# Altium PCB SENSEI_Base-Board_Clean.PcbDoc (part 4 of 7)
Units mm, origin at the board's own origin, x right, y up, seen from the top; angles counter-clockwise.
Board outline 25.2 x 15.15 mm, 8 copper layers (Top Sig/Pwr, GND1, Sig1, GND2, Sig2, Pwr, GND3, Bot Sig/Pwr), stack 1.53 mm thick; 187 components, 192 nets, 951 pads, 1831 vias.
Unrouted connection lines stored in the file: 214.
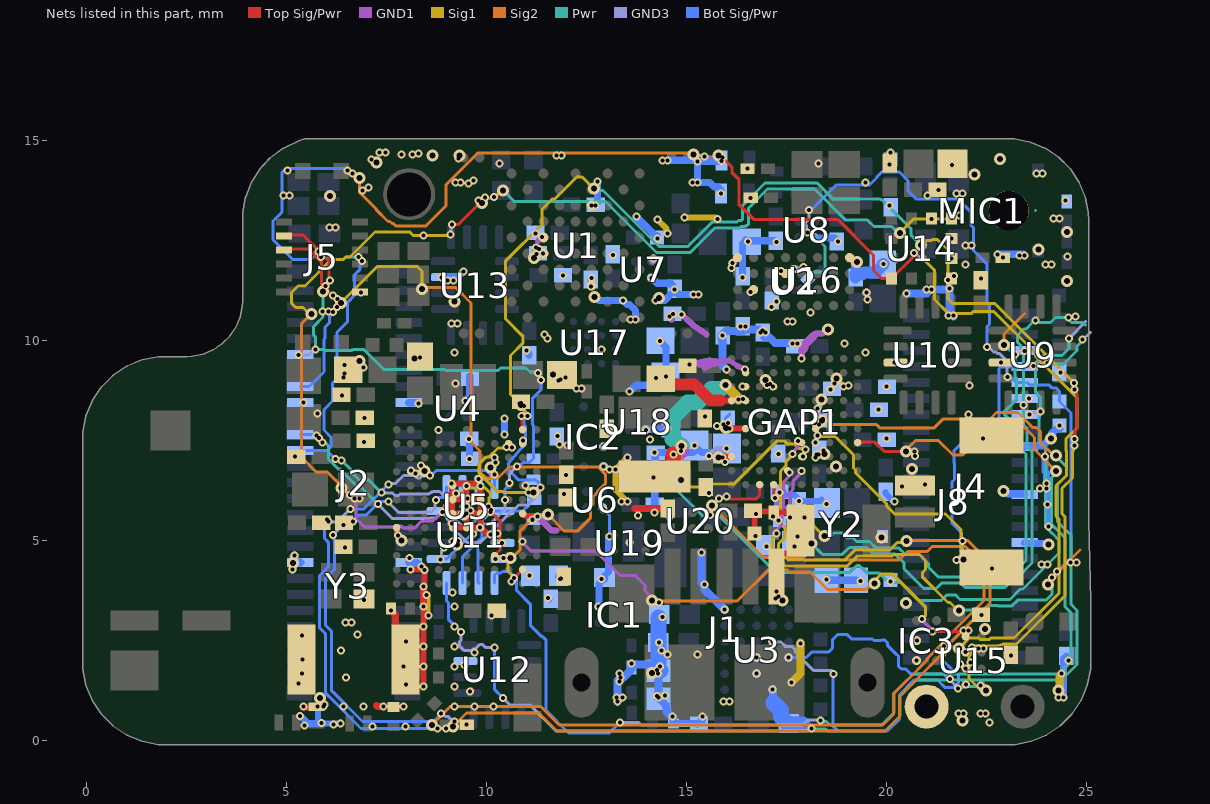
[diagram p9: the nets of this part, all layers, seen from the top]

## Via types
v1: diameter 0.2, hole 0.1, Top Sig/Pwr to GND1, 467 vias
v2: diameter 0.2, hole 0.1, GND3 to Bot Sig/Pwr, 431 vias
v3: diameter 0.2, hole 0.1, GND1 to Sig1, 369 vias
v4: diameter 0.3, hole 0.15, Sig1 to Pwr, 279 vias
v5: diameter 0.2, hole 0.1, Pwr to GND3, 270 vias
v6: diameter 0.3, hole 0.15, Top Sig/Pwr to Bot Sig/Pwr, tented both sides, 15 vias

## Nets (pads, with @x,y where several pads share a name; then routed paths per layer and width w, separated by ;. In a path a pad name is that pad's centre, name@x,y a point inside that pad or via, vN(x,y) a via of type N, cw(c..) or ccw(c..) an arc to the next point about the centre after c; other vN are vias at no path point) (continued)
GND: C3.2 C4.2 C5.2 C6.2 C7.2 C8.2 C9.2 C10.2 C11.2 C12.2 C13.2 C14.2 C15.2 C16.2 C17.2 C18.2 C19.2 C20.2 C21.2 C22.2 C23.2 C24.2 C25.2 C26.2 C27.2 C28.2 C29.2 C30.2 C31.2 C32.2 C33.2 C34.2 C35.2 C36.2 C37.2 C38.2 C39.2 C40.2 C41.2 C42.2 C43.2 C44.2 C45.2 C47.2 C48.2 C49.2 C50.2 C51.2 C52.2 C53.2 C54.2 C55.2 C56.2 C57.2 C58.2 C59.2 C60.2 C61.2 C62.2 C63.2 C64.2 C65.2 C66.2 C67.2 C68.2 C69.2 C70.2 C71.2 C72.2 C73.2 C74.2 C75.2 C76.2 C77.2 C78.2 C79.2 C80.2 C81.2 C82.2 C83.2 C84.2 C85.2 C86.2 C87.2 C88.2 C89.2 C90.2 C91.2 C92.2 C93.2 C94.2 C95.2 C96.2 C97.2 C98.2 C99.2 D2.2 D3.2 E2.1 GAP1.A3 GAP1.A7 GAP1.B5 GAP1.B8 GAP1.B9 GAP1.D8 GAP1.F10 GAP1.G3 GAP1.J8 IC1.A3 IC2.B1 IC2.C1 IC2.D1 IC3.B1 IC3.C1 J1.5 J2.8 J2.18 J2.33 J2.43 J4.15 J4.21 J4.27 J5.12 J8.2 J8.3 J8.4 L9.1 MIC1.3 R4.1 R11.1 R12.1 R13.1 R16.2 R17.1 R18.1 R23.1 R32.1 RT1.2 S1.1 U1.F6 U1.F7 U1.J4 U1.J9 U2.B7 U2.C5 U2.D1 U2.D8 U3.B1 U3.C2 U3.C3 U3.E6 U4.B1 U5.A5 U5.B2 U5.B9 U5.C2 U5.D12 U5.E5 U5.E6 U5.E7 U5.E8 U5.F5 U5.F6 U5.F7 U5.F8 U5.G5 U5.G6 U5.G7 U5.G8 U5.K6 U5.K11 U6.B1 U7.B1 U8.B1 U9.3 U10.3 U11.3 U12.3 U13.3 U14.5 U14.6 U14.8 U15.D1 U16.3 U17.C2 U18.B1 U19.B1 U20.B1 Y2.2 Y3.2 | length 90.1
  Top Sig/Pwr w0.075: v1(8.333,9.577) 8.335,9.579 C72.2@8.335,9.605 ; v1(9.5,0.4) C67.2@9.504,0.4 ; v1(11.937,6.17) 11.937,6.117 C77.2@11.975,6.079 ; C75.2@11.985,6.646 11.985,6.636 v1(11.988,6.634)
  Top Sig/Pwr w0.15: v1@5.425,0.825 5.73,0.825 L9.1@5.75,0.845 ; U5.A5@7.75,5.325 7.758,5.317 7.758,5.164 7.78,5.141 v1(7.78,5.127) ; U5.B2@8.1,4.275 v1(8.102,4.275) ; U5.B9@8.1,6.725 8.1,6.738 v1(8.111,6.749) ; v1(8.102,4.275) 8.425,4.275 U5.C2@8.45,4.3 ; v1(8.425,1.85) 8.425,1.4 v1@8.45,1.375 ; v1(8.425,2.35) 8.425,1.9 v1@8.45,1.875 ; v1(8.425,2.85) 8.425,2.4 v1@8.45,2.375 ; v1(8.425,3.35) 8.425,2.875 v1@8.45,2.85 ; v1@8.45,3.825 8.45,4.269 v1(8.452,4.271) 8.45,4.272 U5.C2@8.45,4.275 ; v1(8.798,7.77) 8.8,7.772 U5.D12@8.8,7.775 ; U5.E6@9.125,5.65 U5.E6@9.136,5.661 ; U5.E8@9.125,6.375 9.136,6.364 U5.E6@9.136,5.661 ; U5.E7@9.15,6.025 U5.F7@9.5,6.025 ; U5.E8@9.15,6.375 9.128,6.397 v1(9.128,6.424) 9.801,6.424 U5.G8@9.85,6.375 v1(9.845,6.37) 9.85,6.365 U5.G7@9.85,6.025 U5.G7@9.85,6 ; U5.F8@9.5,6.375 9.501,6.374 v1(9.501,6.369) 9.5,6.368 9.5,6.05 v1(9.525,6.05) ; v1(9.586,1.229) 9.595,1.229 v1@9.616,1.25 ; U5.G5@9.825,5.35 9.85,5.375 U5.G6@9.85,5.675 ; v1(10.1,5.15) 10.09,5.16 10.026,5.16 9.861,5.325 U5.G5@9.85,5.325 U5.F5@9.5,5.325 ; U5.K6@10.9,5.675 10.911,5.675 10.972,5.614 11.261,5.614 v1(11.27,5.605) ; U5.K11@10.9,7.425 10.903,7.428 10.903,7.503 v1(10.905,7.505) ; v1(11.39,12.585) U1.F7@11.425,12.575 ; 15.85,8.5 GAP1.A7@16.122,8.5 ; v1@15.881,7.056 15.922,7.056 15.959,7.093 16.118,7.093 GAP1.A3@16.125,7.1 ; v1(16.075,7.8) GAP1.B5@16.475,7.8 ; GAP1.A7@16.12,8.498 GAP1.A7@16.122,8.5 ; GAP1.A7@16.125,8.5 GAP1.A7@16.122,8.5 ; v1(16.454,9.28) 16.454,9.266 16.468,9.252 16.468,9.207 GAP1.B9@16.475,9.2 ; GAP1.B8@16.5,8.85 GAP1.B8@16.475,8.85 ; C96.2@16.659,5.75 C96.2@16.7,5.709 ; C96.2@16.725,5.775 16.7,5.75 C96.2@16.7,5.709 ; v1(17.161,8.85) GAP1.D8@17.175,8.85 ; v1(17.165,5.606) 17.175,5.616 R16.2@17.175,5.704 R16.2@17.221,5.704 ; R16.2@17.225,5.7 R16.2@17.221,5.704 ; v1(17.25,3.725) J1.5@17.25,4.1 17.25,4.547 17.378,4.675 17.575,4.675 C91.2@17.725,4.825 ; v1(17.775,5.1) 17.85,5.175 C91.2@17.85,5.25 ; C91.2@17.85,5.675 17.821,5.704 R16.2@17.221,5.704 ; GAP1.G3@18.225,7.1 18.228,7.097 v1(18.228,7.081) ; v1(20.2,9.45) U10.3@20.225,9.45 ; U5.E6@9.136,5.661 v1(9.136,5.426) 9.15,5.426 9.251,5.325 U5.F5@9.5,5.325 ; U5.E6@9.136,5.661 U5.E6@9.15,5.675 v1(9.5,5.675) ; U5.F5@9.5,5.325 v1(9.5,5.675) ; v1(9.5,5.675) U5.G6@9.85,5.675 ; v1(9.5,5.675) U5.F7@9.5,6.025 ; U5.F7@9.5,6.025 9.825,6.025 U5.G7@9.85,6 ; U5.G6@9.85,5.675 U5.G7@9.85,6 ; GAP1.B8@16.475,8.85 v1(16.394,8.85) GAP1.B8@16.475,8.85 ; R32.1@16.7,5.175 C96.2@16.7,5.709 ; R32.1@16.7,5.175 16.7,5.129 v1(16.72,5.109) 16.72,5.155 R32.1@16.7,5.175 ; C96.2@16.7,5.709 16.74,5.669 v1(16.74,5.661) 16.806,5.727 17.198,5.727 R16.2@17.221,5.704
  Top Sig/Pwr w0.18: C65.2@5.864,5.45 5.947,5.532 v1(6.005,5.532) ; C69.2@6.371,8.65 6.371,8.639 v1(6.387,8.622) ; v1(6.423,5.386) 6.431,5.394 C73.2@6.431,5.45 ; v1(6.442,9.18) 6.528,9.267 C71.2@6.539,9.267 ; v1(6.929,3.519) 6.935,3.525 Y3.2@6.935,3.54 ; v1(6.93,7.469) 6.961,7.5 C70.2@6.979,7.5 ; v1(6.951,8.061) 6.954,8.064 C74.2@6.954,8.075 ; 7.25,0.875 7.271,0.854 7.421,0.854 v1(7.425,0.85) ; C66.2@7.612,3.25 7.609,3.253 v1(7.609,3.258) 7.63,3.258 7.648,3.24 7.648,3.22 7.715,3.152 7.715,2.81 7.725,2.8 E2.1@7.775,2.8 ; v1(8.425,3.35) v1(8.425,3.85) ; v1(10.125,3.125) 10.129,3.129 10.129,3.159 10.22,3.25 C80.2@10.254,3.25 ; v1(10.853,8.445) 10.853,8.467 C79.2@10.861,8.474 ; v1(11.415,12.179) 11.42,12.175 U1.F6@11.425,12.175 ; v1(11.859,4.05) 11.875,4.066 C76.2@11.875,4.104 ; v1(12.611,11.358) 12.611,11.361 U1.J4@12.625,11.375 ; U19.B1@13.575,4.95 v1(13.579,4.948) v1(13.579,4.948) ; 13.7,5.8 13.704,5.804 C95.2@14.525,5.804 14.568,5.667 v1(14.568,5.598) ; v1(14.231,9.065) 14.246,9.05 C49.2@14.352,9.05 ; U20.B1@15.55,5.7 15.581,5.669 v1(15.581,5.642) ; v1(16.153,11.942) 16.153,11.948 16.275,12.07 U2.D8@16.275,12.075 ; v1(16.518,14.297) v1(16.518,14.297) C62.2@16.523,14.3 ; v1(16.597,11.217) 16.601,11.22 16.607,11.22 16.661,11.275 U2.B7@16.675,11.275 ; v1(17.363,11.734) 17.422,11.675 U2.C5@17.475,11.675 ; v1(20.07,14.4) 20.08,14.411 C58.2@20.08,14.433 ; v1(20.742,2.005) 20.745,2.005 IC3.C1@20.75,2 ; IC3.B1@20.75,2.5 IC3.B1@20.75,2.5 v1(20.755,2.497) ; v1(21.125,13.039) U14.8@21.125,13.049 ; v1(21.294,13.764) 21.294,13.798 C60.2@21.358,13.861 ; C59.2@21.358,14.16 21.621,14.423 C59.2@21.646,14.423 21.646,14.396 v1(21.637,14.388) ; U14.5@21.624,12.049 U14.5@21.624,12.052 ; U14.6@21.624,12.549 21.627,12.552 v1(21.627,12.557) ; U15.D1@21.975,1.395 U15.D1@21.975,1.4 U15.D1@21.975,1.4 v1(21.982,1.401) ; C94.2@22.359,3.15 C94.2@22.368,3.141 ; C61.2@23.1,2.146 23.1,2.137 v1(23.111,2.126)
  Top Sig/Pwr w0.2: C83.2@11.882,9.139 11.946,9.075 v1(11.975,9.075) ; U2.D1@19.075,12.075 19.083,12.075 19.175,11.983 19.242,11.983 v6(19.261,11.964)
  Top Sig/Pwr w0.3: C49.2@14.35,8.925 14.375,8.9 15.2,8.9 15.6,8.5 15.85,8.5
  GND1 w0.075: v1(18.925,8.85) 18.937,8.862 19.038,8.862 v3(19.05,8.875)
  GND1 w0.12: 16.05,9.5 16.137,9.457 cw(c16.031,9.247) 16.172,9.435 ccw(c16.359,9.682) 16.185,9.425 16.266,9.371
  GND1 w0.15: v1(8.111,6.749) 8.12,6.739 8.149,6.739 8.209,6.679 v3(8.222,6.679) ; v1(9.5,5.675) v3(9.5,5.85) ; v1(11.27,5.605) 11.625,5.25 11.75,5.25 ; 11.28,12.495 v1(11.39,12.585) ; v3(14.875,10.65) 15.149,10.402 ccw(c15.35,10.625) 15.176,10.381 15.5,10.15 ; v1(15.075,9.4) 15.545,9.506 ccw(c15.629,9.82) 15.632,9.495 15.7,9.496 ; 15.325,9.4 15.595,9.449 cw(c15.622,9.301) 15.605,9.451 16.05,9.5 ; 15.45,9.325 15.622,9.403 cw(c15.725,9.175) 15.668,9.418 15.795,9.448 ; v3(15.761,7.864) 15.77,7.855 15.859,7.855 15.904,7.81 16.065,7.81 v1(16.075,7.8) v1@16.078,7.803 ; v1(15.9,7.075) v1@15.9,7.061 ; v3@15.954,6.99 15.954,7.008 v1@15.9,7.061 ; v3(15.963,6.966) 15.963,6.98 15.95,6.993 15.95,7.011 v1@15.9,7.061 ; 16.266,9.371 v1(16.454,9.28) ; v3(17.086,8.916) 17.09,8.916 17.157,8.85 v1(17.161,8.85) ; v1(17.25,3.725) 17.26,3.715 17.26,3.655 17.303,3.611 v3(17.303,3.598) ; v1(17.876,9.55) 17.885,9.56 17.885,9.748 ; 18.187,10.125 18.236,10.174 18.329,10.174 18.393,10.175 18.489,10.271 v6(18.53,10.271) ; v1(18.228,7.081) 18.231,7.081 18.301,7.151 v3(18.301,7.153)
  GND1 w0.18: v1(6.442,9.18) 6.442,9.378 v3(6.45,9.386) ; v3(11.305,12.284) 11.308,12.284 11.412,12.179 v1(11.415,12.179) ; v3(16.119,11.814) 16.122,11.818 16.122,11.906 16.153,11.937 v1(16.153,11.942)
  GND1 w0.2: v3(11.85,9.025) 11.925,9.025 v1(11.975,9.075) ; v1@14.15,12 v1(14.175,12.05) ; v1(14.575,10.6) v1@14.625,10.55 ; 17.885,9.748 17.951,9.814 17.951,9.889 18.187,10.125 ; v1@19.5,11.175 v1(19.5,11.2)
  GND3 w0.075: v2(18.599,8.776) 18.599,8.805 18.693,8.898 v5(18.693,8.927)
  GND3 w0.15: v2(9.425,5.85) 9.435,5.84 9.496,5.84 9.586,5.75 v5(9.6,5.75) ; v5(15.559,7.12) 15.572,7.12 15.742,7.29 15.99,7.29 v2(16,7.3) ; v2(15.925,7.9) 15.939,7.9 15.967,7.928 16.028,7.928 v5(16.037,7.938) ; v2@17.31,6.204 v2(17.323,6.204) ; v2(18.25,7.15) 18.26,7.16 18.321,7.16 18.411,7.25 v5(18.425,7.25) ; v5(18.268,8.302) 18.278,8.292 18.278,8.186 18.405,8.059 v2(18.405,8.045)
  GND3 w0.18: v5(11.232,12.329) 11.232,12.173 v2(11.247,12.158)
  GND3 w0.2: v2(5.156,4.445) 5.2,4.489 v5(5.2,4.625) ; v5(14.254,1.77) v2(14.333,1.849) ; v5(14.262,1.115) 14.439,1.115 v2(14.454,1.13)
  Sig1 w0.075: 14.23,1.166 14.23,1.135 v3(14.292,1.073) ; v4(18.744,9.053) 18.778,9.053 18.947,8.885 19.04,8.885 v3(19.05,8.875)
  Sig1 w0.15: v3(8.222,6.679) 8.232,6.689 8.358,6.689 8.409,6.739 v4(8.449,6.739) ; v4(9.425,5.65) 9.425,5.691 9.49,5.756 9.49,5.84 v3(9.5,5.85) ; v3@13.225,6.75 13.225,6.268 v3(13.52,5.973) ; v3@13.25,6.8 13.25,6.803 v3(13.52,7.073) ; v3(14.272,13.024) 14.272,13.021 14.5,12.793 v3@14.5,12.7 ; v3(14.945,13.073) 14.967,13.073 14.968,13.075 15.722,13.075 15.753,13.044 v3(15.767,13.044) ; v3(15.761,7.864) 15.77,7.855 15.896,7.855 15.94,7.811 v4(15.981,7.811) ; v4(15.8,7.075) 15.841,7.075 15.906,7.01 15.95,6.966 v3(15.963,6.966) ; v4(16.974,9.015) 16.981,9.015 17.08,8.916 v3(17.086,8.916) ; v3(17.303,3.598) v4(17.4,3.5) ; v3(18.301,7.153) 18.306,7.158 18.442,7.158 v4(18.447,7.163) ; v3(19.525,11.025) v3@19.525,11.05
  Sig1 w0.18: v3(6.45,9.386) 6.454,9.39 6.701,9.39 6.794,9.484 v4(6.827,9.484) ; v3(8.502,3.64) 8.502,3.172 v3@8.549,3.125 ; v4(11.181,12.066) 11.204,12.089 11.204,12.178 11.305,12.278 v3(11.305,12.284)
  Sig1 w0.2: v3(5.15,4.275) 5.15,4.44 v2(5.156,4.445) ; v4(11.664,9.153) 11.691,9.153 11.819,9.025 v3(11.85,9.025) ; v4(14.141,1.689) 14.15,1.679 v3(14.287,1.679) ; v3(17.62,1.448) 17.85,1.678 v3@17.85,2.45 ; v4(24.3,1.25) 24.319,1.269 24.319,1.594 v3@24.375,1.65
  Pwr w0.075: v5(18.693,8.927) 18.693,9.002 v4(18.744,9.053)
  Pwr w0.15: v5(8.354,6.873) 8.354,6.86 8.449,6.765 v4(8.449,6.739) ; v4(9.425,5.65) 9.466,5.65 9.556,5.74 9.59,5.74 v5(9.6,5.75) ; v5(15.559,7.12) 15.568,7.111 15.724,7.111 15.759,7.075 v4(15.8,7.075) ; v4(15.981,7.811) 15.981,7.851 16.028,7.898 16.028,7.928 v5(16.037,7.938) ; v4(16.974,9.015) 17,8.99 17,8.901 v5(17.009,8.891) ; v5(17.225,3.55) 17.239,3.55 17.26,3.529 17.371,3.529 v4(17.4,3.5) ; v5(18.268,8.302) 18.268,8.315 18.34,8.387 18.34,8.503 v4(18.369,8.532) ; v5(18.425,7.25) 18.425,7.185 v4(18.447,7.163)
  Pwr w0.18: v4(6.827,9.484) 6.827,9.451 6.923,9.355 6.923,9.332 v5(6.926,9.328) ; v4(11.181,12.066) 11.204,12.089 11.204,12.129 11.228,12.153 11.228,12.325 v5(11.232,12.329)
  Pwr w0.2: v2(5.156,4.445) 5.174,4.464 5.174,4.599 v5(5.2,4.625) ; v4(11.664,9.153) 11.664,9.136 v5(11.8,9) ; v4(14.141,1.689) 14.168,1.689 14.248,1.77 v5(14.254,1.77)
  Bot Sig/Pwr w0.075: U6.B1@12.9,5.825 12.917,5.808 v2(12.917,5.777) 12.928,5.777 13.073,5.631 v2(13.073,5.104) 13.073,5.102 v2@13.1,5.075 ; C40.2@14.3,2.4 14.318,2.418 C43.2@14.318,3.15 14.33,3.15 v2(14.393,3.087) ; C9.2@15.874,10.099 v2(15.9,10.125) ; v2(15.925,7.9) C86.2@15.931,7.9 ; C86.2@15.981,7.9 15.981,7.954 15.967,7.967 15.967,8.053 C86.2@16.075,8.16
  Bot Sig/Pwr w0.15: v2(5.775,0.85) 5.785,0.84 5.785,0.538 5.875,0.447 v2@5.875,0.434 ; v2(5.873,0.436) v2@5.875,0.434 ; v2@5.875,0.425 v2@5.875,0.434 ; v2@6.35,0.45 6.332,0.432 5.876,0.432 v2@5.875,0.434 ; v2(11.539,3.562) C54.2@11.575,3.525 ; v2(16,7.3) 16.004,7.304 C32.2@16.007,7.304 ; C29.2@17.29,7.174 v2(17.301,7.163) ; C34.2@17.321,6.227 17.321,6.206 v2(17.323,6.204) ; C34.2@17.45,6.175 17.45,6.163 17.473,6.14 17.702,6.14 17.811,6.031 v2(17.811,5.993) ; C44.2@17.684,4.906 17.7,4.891 v2(17.7,4.85) ; C36.2@17.808,5.988 17.811,5.991 v2(17.811,5.993) ; Y2.2@18.375,6.025 18.343,5.993 v2(17.811,5.993) ; v2(18.405,8.045) 18.405,8.029 C25.2@18.423,8.011 ; v2(18.493,5.916) 18.508,5.932 Y2.2@18.508,5.937 ; C35.2@19.975,6.221 19.975,6.175 v2@20.175,5.975
  Bot Sig/Pwr w0.18: v2(5.34,0.613) 5.346,0.613 5.534,0.425 v2@5.85,0.425 ; J2.8@8.055,4.45 8.275,4.45 8.372,4.353 v2(8.372,4.35) ; J2.8@8.072,4.463 v2(8.072,4.565) ; U13.3@8.925,11.6 9.289,11.6 9.418,11.729 v2(9.423,11.729) ; v2(9.472,8.494) 9.477,8.499 U4.B1@9.483,8.499 9.483,8.511 9.579,8.607 C19.2@9.579,9.11 ; C18.2@9.568,7.551 v2(9.563,7.545) 9.574,7.534 C53.2@9.574,7.04 ; v2(9.571,7.037) C53.2@9.574,7.04 ; C53.2@9.574,7.001 C53.2@9.574,7.04 ; C53.2@9.581,7.046 C53.2@9.574,7.04 ; v2(10.385,4.935) 10.397,4.935 U11.3@10.4,4.938 ; v2(10.448,8.054) v2(10.448,7.654) 10.448,7.652 v2@10.45,7.65 ; v2(10.999,9.751) 10.999,9.736 11.063,9.672 C82.2@11.063,9.634 ; C6.2@11.219,12.691 v2(11.225,12.675) ; C81.2@11.75,7.6 11.761,7.6 v2(11.772,7.611) ; C16.2@11.8,4.118 11.8,4.082 v2(11.838,4.044) ; v2(11.907,11.625) 11.909,11.627 C57.2@11.909,11.635 ; C97.2@12.6,11.525 12.6,11.543 v2(12.621,11.565) ; v6@12.675,11.1 12.716,11.1 12.813,11.004 13.405,11.004 v2(13.406,11.003) ; C7.2@12.725,13.4 12.769,13.444 12.769,13.975 v2(12.773,13.979) ; IC1.A3@12.8,3.35 v2(12.801,3.356) 12.807,3.362 12.807,3.926 12.906,4.025 C15.2@12.95,4.025 ; v2(12.875,9.773) U17.C2@12.875,9.775 ; IC2.D1@12.925,6.85 12.925,6.855 v2(12.927,6.857) ; IC2.C1@12.925,7.35 12.927,7.35 v2(12.931,7.347) ; C15.2@12.947,4.073 12.913,4.038 v2(12.876,4.038) 13.05,4.212 v2@13.05,5.1 ; C22.2@13.15,12.159 13.15,12.155 v2(13.165,12.14) ; v2@13.398,11 13.414,11 13.513,10.901 13.574,10.901 13.719,10.756 13.719,10.533 v2(13.723,10.529) ; v2(13.573,8.729) 13.579,8.729 13.735,8.885 14.435,8.885 C55.2@14.55,9 ; v2(13.748,13.104) 13.752,13.1 13.752,13.086 14.213,12.625 R11.1@14.275,12.625 ; U18.B1@13.975,7.775 13.975,7.769 v2(13.979,7.765) v2(13.979,7.765) 13.996,7.784 14.516,7.784 C85.2@14.55,7.75 ; U7.B1@14.119,11.568 v2(14.126,11.568) 14.131,11.568 14.267,11.433 14.609,11.433 14.65,11.391 C39.2@14.65,11.35 ; v2(14.198,7.204) C84.2@14.202,7.2 ; C21.2@14.204,5.9 14.204,6.529 C20.2@14.225,6.55 ; v2(14.223,11.004) 14.227,11.008 14.458,11.008 14.65,11.2 C39.2@14.7,11.2 ; C20.2@14.225,6.6 14.217,6.608 14.217,7.185 C84.2@14.202,7.2 ; R11.1@14.263,12.575 14.263,12.563 v2(14.269,12.558) ; v2(14.333,9.993) 14.34,9.993 C24.2@14.348,10 ; C24.2@14.375,9.95 14.486,9.839 C55.2@14.486,9.111 ; C55.2@14.473,9.125 C55.2@14.486,9.111 ; v2(14.486,9.104) C55.2@14.486,9.111 ; C23.2@14.646,10.675 14.651,10.675 v2(14.656,10.669) ; v2(14.653,0.6) 14.657,0.596 14.657,0.568 14.657,0.443 RT1.2@14.675,0.425 15.25,0.425 C12.2@15.275,0.4 ; v2(14.701,11.273) C39.2@14.7,11.296 ; C39.2@14.725,11.25 14.725,11.225 14.791,11.159 14.816,11.159 14.821,11.154 v2(15.298,11.154) ; C87.2@15.2,7.375 15.375,7.2 C32.2@15.925,7.2 ; C87.2@15.25,7.275 15.175,7.2 C84.2@14.229,7.2 C84.2@14.202,7.2 ; v2@15.25,13.95 15.58,13.95 15.693,13.837 15.797,13.837 15.858,13.777 D2.2@15.857,13.677 v2(15.858,13.673) ; C12.2@15.308,0.425 15.392,0.509 15.392,0.596 v2(15.396,0.6) ; v2@15.35,14.475 15.851,14.475 v2(15.872,14.495) D3.2@15.871,14.502 ; v2(16.398,11.579) 16.4,11.581 C11.2@16.4,11.609 16.4,12.425 C10.2@16.45,12.475 ; C10.2@16.475,12.525 16.504,12.496 C47.2@17.225,12.496 17.241,12.479 v2(17.241,12.465) ; C10.2@16.502,12.475 16.508,12.481 v2(16.539,12.481) ; U16.3@18.032,11.525 18.032,11.513 v2(18.034,11.511) ; U8.B1@18.2,12.575 18.209,12.566 18.706,12.566 C48.2@18.734,12.539 ; C93.2@18.525,4.05 18.568,4.007 C45.2@19.234,4.007 ; C45.2@19.305,4 19.336,4 v2(19.342,3.995) ; R13.1@20.1,14.525 20.101,14.526 20.101,14.699 v2(20.102,14.7) ; v2(23.956,7.101) 23.96,7.097 23.96,6.732 23.994,6.698 23.994,6.438 24.006,6.427 v2@24.007,6.427 ; v2@24,5.925 24.048,5.877 v2(24.048,5.354) ; v2(24.023,5.904) v2@24.023,6.427 ; v2@24.425,1.1 24.425,2.043 C92.2@24.495,2.113
  Bot Sig/Pwr w0.185: J2.18@8.055,8.45 8.275,8.45 8.293,8.432 8.293,8.425 v2(8.296,8.422) ; v2(14.523,14.504) 15.271,14.504 15.3,14.475 15.273,14.448 v2(15.273,13.954) ; v2(22.773,12.154) 23.419,12.154 23.448,12.125 v2@23.45,12.125 ; v6(22.924,6.242) 22.955,6.242 23.025,6.173 23.432,6.173 J4.21@23.455,6.15 ; J4.27@23.455,4.95 23.478,4.927 23.99,4.927 24.017,4.9 v6(24.049,4.9) ; J4.15@23.455,7.35 23.478,7.373 23.9,7.373 24.076,7.549 v6(24.107,7.549) 24.129,7.571 24.129,7.679 24.25,7.8 R12.1@24.325,7.8
  Bot Sig/Pwr w0.2: v2(5.156,4.445) 5.161,4.45 J2.43@5.345,4.45 ; v2(13.274,0.98) 13.274,1.499 v2(13.35,1.575) 13.425,1.575 13.625,1.775 v2(13.625,1.925) 13.645,1.905 14.277,1.905 14.295,1.887 v2(14.333,1.849) 14.298,1.813 14.298,1.802 C14.2@14.298,1.75 14.298,1.177 C13.2@14.325,1.15 ; v2(14.454,1.13) 14.377,1.13 C13.2@14.298,1.05 14.32,1.05 14.5,0.87 14.5,0.725 v2@14.657,0.568 ; v2(15.373,4.704) 15.373,3.952 v2@15.425,3.9 ; v2(15.448,3.904) 15.448,3.777 U3.E6@15.925,3.3 ; C9.2@15.874,10.041 15.874,10.099 15.874,10.135 15.981,10.242 16.417,10.242 C26.2@16.45,10.275 ; C9.2@15.9,10.025 15.9,9.377 v2(15.998,9.279) ; v2(16.475,10.35) 16.475,10.288 16.481,10.281 16.819,10.281 C37.2@16.925,10.175 ; C37.2@16.95,10.075 17.077,10.075 17.214,9.938 17.764,9.938 v2(17.773,9.929) ; v2(17.15,1.275) 17.154,1.271 17.154,0.959 17.168,0.945 ; v2(17.298,5.504) 17.311,5.504 17.322,5.515 17.322,6.147 C34.2@17.4,6.225 ; v2(20.498,11.179) 21.004,11.179 v2@21.1,11.275 ; v2(21.123,11.279) 21.504,11.279 v2@21.525,11.3 ; v2(21.573,11.304) 21.573,10.702 v2@21.675,10.6
  Bot Sig/Pwr w0.25: C99.2@19.195,11.681 19.24,11.681 19.24,11.931 19.261,11.952 v6(19.261,11.964)
  Bot Sig/Pwr w0.3: C99.2@19.225,11.579 19.225,11.625 19.256,11.656 19.386,11.656 19.432,11.702 19.72,11.702 19.9,11.882 C8.2@19.9,11.905 19.908,11.905 v2(19.917,11.914)
  Bot Sig/Pwr w0.4: C40.2@14.293,2.45 C40.2@14.31,2.45 ; C43.2@14.3,3.075 14.3,2.461 v2(14.311,2.451) C40.2@14.31,2.45 ; C14.2@14.35,1.75 14.298,1.802 14.295,1.805 14.295,1.887 14.295,2.436 C40.2@14.31,2.45 ; 17.168,0.945 17.357,0.755 17.357,0.6 17.532,0.425 C42.2@17.554,0.425 17.579,0.4 17.897,0.4
  other v1: 5.425,0.85 5.925,0.85 6.425,0.85 6.925,0.85 7.925,0.85 9.2,0.85 9.7,0.85 10.172,0.85 15.925,0.975 13.25,1.075 8.425,1.35 9.2,1.35 7.986,1.401 13.325,1.475 6.486,1.576 5.386,1.676 9.2,1.85 9.699,2.204 6.361,2.251 9.2,2.35 7.986,2.476 5.386,2.626 9.2,2.85 6.475,2.95 22.368,3.141 9.192,3.348 9.15,3.7 22.636,4.301 23.875,4.4 24.6,4.45 6.461,4.826 9.836,5.326 13.786,5.626 13.375,5.975 15.566,6.184 23.838,6.301 20.386,6.351 20.961,6.401 13.075,6.775 5.211,7.101 14.086,7.526 22.411,7.551 13,7.75 15.461,8.101 22.861,9.451 11.45,10.15 16.9,10.25 9.125,10.425 24.725,10.6 5.9,10.725 6.861,11.201 9.025,11.5 22.361,11.551 23.975,11.9 21.625,12.052 22.911,12.076 21.975,12.375 6.075,12.825 24.175,13.05 12.625,13.375 16.601,13.562 4.925,13.625 21.75,13.675 7.05,13.825 9.55,13.925 23.75,14.175 8.153,14.654 7.325,14.7
  other v2: 6.348,0.429 21.923,0.679 22.473,0.679 24.423,1.079 22.348,1.379 16.75,1.675 9.45,1.883 22.098,1.954 24.55,2 16.75,2.075 14.525,2.15 22.423,2.304 22.048,2.754 15.95,3.275 20.098,3.979 18.498,4.029 11.073,4.129 16.998,4.854 19.873,5.104 14.2,5.7 20.198,5.979 6.823,6.054 23.998,6.429 14.173,6.579 12.025,7.375 15.198,7.379 19.998,7.554 14.523,7.804 12.925,7.84 24.323,7.879 22.048,8.154 19.798,8.279 5.423,8.454 12.373,8.804 19.998,8.854 22.073,8.879 24.348,9.204 19.473,9.704 18.948,9.929 16.973,10.204 17.648,10.479 21.673,10.629 18.098,10.704 17.248,10.979 8.873,11.579 23.448,12.129 18.782,12.483 8.423,12.629 12.723,13.379 20.073,13.379 9.798,13.504 24.473,13.504 9.348,13.954 15.273,14.479 7.123,14.529 9.298,14.554 11.873,14.629
  other v3: 7.145,0.348 7.97,0.348 5.445,0.373 6.17,0.398 22.57,0.448 16.07,0.973 13.395,1.073 5.295,1.423 13.32,1.673 24.37,1.673 7.925,1.855 5.395,2.023 15.27,2.148 17.845,2.423 6.77,2.648 6.62,2.948 8.545,3.123 24.02,4.398 24.745,4.448 10.27,5.173 24,6.3 13.22,6.773 5.745,7.623 5.77,8.173 9.22,8.923 6.42,9.073 9.195,9.698 11.525,10.05 9.27,10.423 23.72,10.498 24.55,10.575 6.045,10.723 9.17,11.498 21.97,11.898 24.12,11.898 24.52,12.098 22.12,12.373 14.525,12.675 6.22,12.823 24.32,13.048 5.07,13.623 21.02,13.623 21.895,13.673 6.901,13.746 19.47,13.948 9.67,13.998 23.895,14.173 5.02,14.248 10.32,14.423 18.301,14.429 8.3,14.675 7.47,14.698
  other v4: 21.9,0.5 5.829,1.059 22.454,2.784 20.479,3.434 5.155,4.445 7.875,5 19.875,5.075 20.629,6.784 18.729,6.848 8.2,9.55 9.2,10.975 14.304,11.059 24.504,11.484 23.8,12.275 24.504,12.709 9.879,13.434 6.079,13.609 22.2,14.15 7.25,14.45 22.829,14.534 8.65,14.625 9.325,14.625 15.8,14.625
  other v5: 21.8,0.675 22.35,0.675 5.95,0.9 24.3,1.075 14.375,2.25 22.3,2.3 21.925,2.75 6.7,6.05 11.825,7.4 12.25,8.8 17.65,9.925 16.85,10.2 16.352,10.346 17.525,10.475 13.6,10.525 21.55,10.625 17.125,10.837 15.175,11.15 21,11.275 23.325,12.125 9.225,13.95 15.15,13.95 14.4,14.5 11.75,14.625 7.875,14.65
  other v6: 12.694,11.09
I2C_A_SCL: J2.36 R26.2 U3.B4 U5.J11 U11.1 U14.1 U15.C1 | length 64.5
  Top Sig/Pwr w0.075: U5.J11@10.55,7.425 10.55,7.42 10.634,7.336 v1(10.634,7.332) ; v1(15.896,14.574) 16.131,14.34 16.131,14.206 16.316,14.02 16.316,13.395 16.68,13.031 18.777,13.031 19.673,12.135 19.673,11.755 19.878,11.55 U14.1@20.125,11.55 20.684,12.109 v1(20.684,12.188) ; U15.C1@21.957,1.814 21.971,1.814 v1(21.978,1.807)
  GND1 w0.075: v3(10.499,7.335) 10.501,7.334 10.632,7.334 v1(10.634,7.332) ; v3(15.45,14.6) 15.463,14.587 15.883,14.587 v1(15.896,14.574) ; v1(20.684,12.188) 20.717,12.188 20.821,12.085 20.872,12.085 v3(20.896,12.061) ; v3(21.831,1.914) 21.851,1.914 21.958,1.807 v1(21.978,1.807)
  Sig2 w0.075: v4(6.82,14.061) 6.82,13.708 7.239,13.289 7.239,13.272 7.534,12.977 7.581,12.977 7.633,12.925 7.668,12.925 7.706,12.887 7.73,12.863 7.903,12.863 8.479,12.862 8.991,13.375 8.991,13.9 9.775,14.684 15.141,14.684 v4(15.175,14.65)
  GND3 w0.075: v2(5.8,12.225) 5.824,12.201 5.824,12.155 5.854,12.126 v5(5.854,12.092) ; v2(6.217,7.041) 6.235,7.024 6.357,7.024 v5(6.375,7.006) ; v2(6.52,14.257) 6.546,14.257 6.62,14.183 v5(6.646,14.183) ; v5(6.791,12.095) 6.791,12.09 6.888,11.992 v2(6.888,11.987) ; v5(7.369,6.199) 7.35,6.18 7.448,6.18 7.462,6.194 7.638,6.194 7.652,6.18 7.66,6.18 7.707,6.133 7.803,6.133 7.833,6.163 8.561,6.163 8.595,6.197 8.622,6.197 8.656,6.232 8.675,6.232 ; 8.676,6.232 8.812,6.232 8.816,6.228 8.825,6.228 8.99,6.063 8.99,5.94 9.115,5.816 9.115,5.704 9.211,5.608 9.211,5.541 9.408,5.344 9.541,5.344 9.578,5.381 9.584,5.381 9.765,5.561 9.941,5.561 v2(10.098,5.719) ; v5(10.975,6.375) 10.999,6.351 10.999,6.279 11.046,6.232 v2(11.046,6.199) ; v2(17.15,2.475) 17.161,2.464 17.363,2.464 17.479,2.348 17.646,2.348 17.708,2.286 17.708,2.218 17.762,2.163 18.179,1.746 18.631,1.746 18.631,1.738 18.675,1.694 v2(18.675,1.66) ; v2(21.399,2.183) 21.415,2.2 21.415,2.346 v5(21.431,2.363)
  Sig1 w0.075: v3(10.499,7.335) 10.478,7.315 10.287,7.315 10.056,7.084 9.995,7.084 9.993,7.082 9.98,7.082 9.814,6.916 9.814,6.681 10.263,6.232 10.296,6.232 10.307,6.221 10.411,6.221 10.424,6.208 11.167,6.208 v4(11.175,6.2) ; v4(15.175,14.65) 15.201,14.624 15.426,14.624 v3(15.45,14.6) ; v3(20.896,12.061) 21.198,11.759 21.198,11.03 21.554,10.674 22.113,10.674 22.162,10.723 22.687,10.723 23.722,9.688 23.722,9.608 24.757,8.573 24.757,7.812 24.487,7.543 24.487,7.244 24.495,7.236 24.495,6.628 24.237,6.37 24.237,5.609 24.311,5.536 24.311,3.686 23.188,2.563 22.604,2.563 22.562,2.521 22.345,2.521 22.304,2.563 22.066,2.563 21.814,2.31 v4(21.813,2.3) ; v4(21.813,2.3) 21.822,2.291 21.822,1.923 v3(21.831,1.914)
  Pwr w0.075: v5(5.854,12.092) 5.867,12.078 6.066,12.078 6.113,12.032 6.423,12.032 6.487,12.095 v5(6.791,12.095) ; v5(6.375,7.006) 6.607,6.774 6.607,6.722 6.815,6.514 7.055,6.514 v5(7.369,6.199) ; v5(6.646,14.183) 6.672,14.183 6.794,14.061 v4(6.82,14.061) ; v5(10.975,6.375) 10.987,6.375 11.162,6.2 v4(11.175,6.2) ; v5(21.431,2.363) 21.436,2.358 21.528,2.358 21.543,2.343 21.77,2.343 v4(21.813,2.3)
  Bot Sig/Pwr w0.075: J2.36@5.345,7.25 6.008,7.25 ; v2(5.8,12.225) 5.608,12.033 5.148,12.033 4.663,12.518 4.663,12.99 4.882,13.21 4.882,14.205 4.972,14.296 6.424,14.296 6.463,14.257 v2(6.52,14.257) ; v2(6.217,7.041) 6.008,7.25 ; v2(6.888,11.987) 6.888,11.953 6.84,11.905 6.84,11.786 6.697,11.643 6.697,11.133 6.526,10.961 6.526,10.476 6.257,10.206 6.257,9.048 6.149,8.941 6.149,8.488 5.94,8.279 5.94,8.259 5.932,8.251 5.932,7.762 6.108,7.585 6.108,7.349 6.009,7.25 ; v2(10.098,5.719) 10.118,5.738 U11.1@10.35,5.738 ; U11.1@10.393,5.743 10.909,5.743 11.052,5.885 11.052,5.931 11.146,6.025 R26.2@11.191,6.025 ; v2(11.046,6.199) 11.052,6.193 11.052,6.119 11.123,6.047 R26.2@11.171,6.047 ; v2(18.675,1.66) 18.655,1.64 18.655,0.374 18.791,0.237 20.025,0.237 20.323,0.536 20.323,0.792 20.322,0.812 20.322,1.154 20.681,1.513 21.274,1.513 21.464,1.323 21.671,1.323 21.795,1.448 21.795,1.624 21.671,1.748 21.665,1.748 21.399,2.014 v2(21.399,2.183)
I2C_A_SCL_GAP: GAP1.C1 U11.16 | length 39.4
  Top Sig/Pwr w0.075: v1(15.996,6.106) 15.996,6.092 16.044,6.044 16.744,6.044 16.825,6.125 GAP1.C1@16.825,6.4
  GND1 w0.075: v3(15.812,6.047) 15.845,6.047 15.881,6.082 15.972,6.082 v1(15.996,6.106)
  Sig2 w0.075: v4(8.629,0.392) 9.084,0.847 11.36,0.847 11.819,0.387 19.912,0.387 20.175,0.65 20.175,1.174 20.529,1.528 20.534,1.528 21.005,1.999 21.005,2.04 21.401,2.435 21.401,2.471 21.42,2.491 22.432,3.503 22.432,4.358 22.188,4.602 22.188,4.634 21.967,4.854 21.139,4.854 21.013,4.728 20.524,4.728 20.31,4.515 18.207,4.515 17.95,4.515 17.887,4.578 16.936,4.578 15.637,5.877 v4(15.637,5.881)
  GND3 w0.075: v2(6.05,5.482) 6.071,5.461 6.263,5.461 v2(6.591,5.789) ; v2(7.55,6.406) 7.574,6.43 7.724,6.43 7.921,6.627 8.206,6.627 8.268,6.565 8.334,6.565 8.378,6.608 8.562,6.608 v2(8.586,6.632) ; v5(8.775,0.3) 8.777,0.302 8.982,0.302 v2(8.984,0.304)
  Sig1 w0.075: v4(15.637,5.881) 15.641,5.881 15.807,6.047 v3(15.812,6.047)
  Pwr w0.075: v4(8.629,0.392) 8.672,0.349 8.699,0.349 8.748,0.3 v5(8.775,0.3)
  Bot Sig/Pwr w0.075: v2(6.05,5.482) 6.05,5.448 5.945,5.344 5.945,5.056 6.043,4.958 6.043,4.337 5.825,4.118 5.825,2.82 5.967,2.677 5.967,1.196 6.194,0.968 6.859,0.304 v2(8.984,0.304) ; v2(6.591,5.789) 6.929,5.789 7.547,6.406 v2(7.55,6.406) ; v2(8.586,6.632) 8.62,6.632 8.738,6.751 9.987,6.751 10.2,6.538 U11.16@10.2,6.338
I2C_A_SDA: J2.35 R27.2 U3.A3 U5.K12 U11.12 U14.4 U15.B1 | length 52.3
  Top Sig/Pwr w0.075: v1(10.872,8.118) 10.886,8.104 10.886,7.789 U5.K12@10.9,7.775 ; U14.4@21.625,11.55 21.629,11.55 v1(21.687,11.609) ; v1(24.692,7.543) 24.716,7.567 24.716,7.747 24.763,7.793 24.763,8.672 24.693,8.741 v1(24.693,8.775)
  GND1 w0.075: v1(10.872,8.118) 10.875,8.115 11.022,8.115 v3(11.025,8.112) ; v3(21.534,11.518) 21.565,11.518 21.656,11.609 v1(21.687,11.609) ; v1(21.976,2.209) 21.994,2.209 22.118,2.333 v3(22.136,2.333) ; v3(24.689,8.942) 24.691,8.94 24.691,8.777 v1(24.693,8.775) ; v1(24.692,7.543) 24.696,7.539 24.696,7.381 v3(24.7,7.377)
  GND3 w0.075: v2(5.811,7.569) 5.811,7.553 5.898,7.466 v5(5.898,7.45) ; v5(7.285,5.909) 7.636,5.558 8.577,5.558 8.581,5.562 8.749,5.562 8.897,5.709 v2(8.902,5.709) 8.902,5.694 9.004,5.592 9.004,5.55 9.061,5.493 9.061,5.403 9.508,4.956 9.848,4.956 10.693,5.8 10.714,5.8 10.804,5.891 11.038,5.891 11.319,6.171 11.319,6.307 v2(11.343,6.331) ; v5(10.819,8.43) 10.842,8.43 10.907,8.366 v2(10.93,8.366) ; v2(21.583,1.536) 21.583,1.516 21.779,1.32 v5(21.779,1.3)
  Sig1 w0.075: v3(11.025,8.112) 11.001,8.136 11.001,8.186 10.858,8.329 v4(10.858,8.39) 10.596,8.651 10.596,9.627 10.905,9.935 10.905,10.111 10.477,10.539 10.477,11.992 11.384,12.899 11.384,13.286 11.639,13.542 11.705,13.542 12.252,14.089 12.388,14.089 v4(12.68,13.796) ; v4(20.859,12.384) 20.859,12.409 20.954,12.504 21.117,12.504 21.136,12.524 21.273,12.524 21.534,12.263 v3(21.534,11.518) 21.534,11.033 21.646,10.921 22.71,10.921 v3(24.689,8.942) ; v3(22.136,2.333) 22.112,2.309 22.112,2.152 22.06,2.099 22.06,1.552 22.362,1.25 v4(22.489,1.25) ; v3@22.152,2.366 22.751,2.366 22.899,2.4 22.912,2.413 23.25,2.413 24.461,3.624 24.461,3.732 24.461,5.598 24.388,5.671 24.388,6.308 24.645,6.565 24.645,7.23 24.676,7.261 24.676,7.353 v3(24.7,7.377)
  Pwr w0.075: v5(5.898,7.45) 5.922,7.426 5.994,7.426 6.053,7.367 6.053,7.028 6.287,6.794 6.323,6.794 6.753,6.364 6.83,6.364 v5(7.285,5.909) ; v5(10.819,8.43) 10.819,8.429 v4(10.858,8.39) ; v4(12.68,13.796) 12.723,13.753 12.908,13.753 14.311,12.351 15.03,12.351 15.643,12.963 16.261,12.963 16.297,12.999 16.358,12.999 16.402,13.043 16.402,13.378 16.962,13.938 18.264,13.938 18.665,13.536 19.839,13.536 19.848,13.527 19.875,13.527 20.408,12.994 20.613,12.788 20.613,12.636 20.859,12.391 v4(20.859,12.384) ; v5@21.767,1.307 21.784,1.324 21.891,1.324 21.916,1.349 22.252,1.349 22.352,1.25 v4(22.489,1.25)
  Bot Sig/Pwr w0.075: J2.35@5.345,7.65 5.729,7.65 v2(5.811,7.569) ; v2(10.93,8.366) 10.93,7.908 10.971,7.867 10.971,7.406 10.826,7.262 10.549,6.941 10.545,6.831 10.545,6.786 10.551,6.763 10.664,6.65 10.793,6.521 11.225,6.521 11.315,6.431 11.315,6.394 11.343,6.365 v2(11.343,6.331) ; v2(17.55,2.075) 17.991,2.075 18.128,2.213 18.551,2.213 18.648,2.309 18.648,2.522 18.772,2.647 19.016,2.647 19.126,2.537 19.647,2.537 19.682,2.502 19.858,2.502 19.868,2.511 19.959,2.511 20.027,2.442 20.027,2.371 20.251,2.147 20.259,2.147 20.302,2.103 20.302,1.853 20.368,1.787 20.479,1.787 20.604,1.663 21.422,1.663 21.549,1.536 v2(21.583,1.536)
I2C_A_SDA_GAP: GAP1.F4 U11.13 | length 36.9
  GND1 w0.075: v3(17.641,7.162) 17.641,7.196 17.766,7.321 17.766,7.46 v1(17.79,7.484)
  Sig2 w0.075: v4(9.159,0.35) 9.499,0.69 11.305,0.69 11.757,0.237 19.975,0.237 20.325,0.588 20.325,1.112 20.591,1.378 20.596,1.378 21.551,2.333 21.551,2.409 21.689,2.548 22.582,3.441 22.582,4.42 22.551,4.451 22.551,4.455 22.338,4.668 22.338,4.696 22.029,5.004 20.516,5.004 v4(20.503,4.991)
  GND3 w0.075: v2(6.158,5.144) v2(6.158,5.144) 6.473,5.458 6.633,5.458 v2(6.657,5.482) ; v2(7.55,5.981) 7.55,5.953 7.795,5.708 8.515,5.708 8.519,5.712 8.62,5.712 8.674,5.766 8.674,5.781 8.713,5.821 8.713,5.992 v2(8.737,6.016) ; v2(8.864,0.672) 8.898,0.672 8.972,0.598 9.043,0.598 9.166,0.475 v5(9.2,0.475)
  Sig1 w0.075: v3(17.641,7.162) 17.641,7.132 17.48,6.97 17.48,6.866 17.346,6.733 17.346,5.428 17.463,5.311 17.463,5.085 17.298,4.92 17.298,4.742 17.404,4.636 17.411,4.636 17.533,4.515 18.956,4.515 19.201,4.76 20.075,4.76 20.267,4.951 20.463,4.951 v4(20.503,4.991)
  Pwr w0.075: v4(9.159,0.35) 9.159,0.434 v5(9.2,0.475)
  Bot Sig/Pwr w0.075: v2(6.158,5.144) 6.182,5.12 6.182,5.032 6.193,5.02 6.193,4.275 5.975,4.056 5.975,2.882 6.117,2.739 6.117,1.258 6.896,0.479 8.671,0.479 v2(8.864,0.672) ; v2(6.657,5.482) 6.814,5.639 6.991,5.639 7.334,5.981 v2(7.55,5.981) ; v2(8.737,6.016) 8.753,6.016 8.821,6.083 8.938,6.083 9,6.145 U11.13@9,6.338
I2C_B_SCL: J2.30 J5.3 R28.2 U5.E4 U11.9 | length 17.3
  Top Sig/Pwr w0.075: J5.3@4.818,12.636 5.415,12.636 6.065,11.986 6.065,11.515 v1(6.084,11.496)
  GND1 w0.075: v3(5.976,11.366) 5.976,11.377 6.084,11.485 v1(6.084,11.496) ; v1(9.149,4.973) 9.159,4.983 9.275,4.983 v3(9.285,4.993)
  GND3 w0.075: v2(5.299,9.639) 5.552,9.639 5.685,9.772 v5(5.719,9.772) ; v2(8.845,4.523) 8.869,4.547 8.869,4.725 8.936,4.791 v5(8.936,4.825) ; v2(9.666,5.168) 9.909,5.411 10.091,5.411 10.462,5.782 v2(10.462,6.013) ; v2(10.576,6.438) 10.578,6.441 10.578,6.676 10.755,6.853 v2(10.762,6.853) ; v5(11.285,9.188) 11.309,9.164 11.309,9.104 11.362,9.051 v2(11.362,9.019)
  Sig1 w0.075: v4(5.909,11.227) 5.909,11.299 v3(5.976,11.366) ; v4(9.261,4.905) 9.261,4.969 v3(9.285,4.993)
  Pwr w0.075: v4(5.909,11.227) 5.909,10.588 5.719,10.399 5.719,10.395 5.677,10.353 5.677,10.136 5.719,10.094 v5(5.719,9.772) 5.945,9.772 5.969,9.748 6.621,9.748 6.655,9.781 6.925,9.781 7.423,9.283 8.947,9.283 8.976,9.254 10.29,9.254 10.348,9.313 10.984,9.313 11.084,9.212 11.262,9.212 v5(11.285,9.188) ; v5(8.936,4.825) 8.97,4.825 9.022,4.878 9.234,4.878 v4(9.261,4.905)
  Bot Sig/Pwr w0.075: U11.9@8.843,4.537 9.006,4.537 9.637,5.168 v2(9.666,5.168) ; v2(8.845,4.523) 8.848,4.523 U11.9@8.85,4.525 ; v2(10.462,6.013) 10.462,6.29 10.576,6.404 v2(10.576,6.438) ; v2(10.762,6.853) 10.936,6.956 11.077,6.956 R28.2@11.171,7.05 11.171,7.88 11.143,7.908 11.143,8.548 11.362,8.768 v2(11.362,9.019)
I2C_B_SCL_GAP: GAP1.G5 U11.8 | length 32.5
  GND1 w0.075: v3(18.208,7.937) 18.239,7.937 18.255,7.921 18.289,7.921 v1(18.313,7.897)
  Sig2 w0.075: v4(18.382,7.997) 18.425,7.954 18.584,7.954 18.639,7.9 19.742,7.9 19.76,7.881 19.768,7.881 19.841,7.808 21.177,7.808 21.404,8.035 22.584,8.035 22.749,8.2 23.285,8.2 23.662,7.823 23.748,7.823 23.845,7.727 23.845,7.44 23.999,7.286 24.021,7.286 24.18,7.127 v4(24.233,7.127)
  GND3 w0.075: v2(9.358,2.712) v2(9.358,2.712) 9.357,2.499 9.319,2.462 9.319,2.37 9.444,2.246 9.62,2.246 9.663,2.289 9.714,2.289 9.831,2.407 9.893,2.407 9.969,2.332 v2(10.193,2.332) ; v2(10.413,1.064) 10.582,0.895 11.08,0.895 11.737,0.237 18.024,0.237 18.086,0.3 v5(18.12,0.3)
  Sig1 w0.075: v3(18.208,7.937) 18.232,7.961 18.346,7.961 v4(18.382,7.997)
  Pwr w0.075: v5(18.12,0.3) 18.134,0.286 18.476,0.286 18.525,0.237 19.958,0.237 20.337,0.617 20.337,1.105 20.447,1.215 cw(c21,0.85) 20.635,1.403 20.745,1.513 24.374,1.513 24.763,1.901 24.763,3.255 24.611,3.406 24.611,5.133 24.27,5.474 24.27,6.403 24.495,6.628 24.495,6.845 24.233,7.107 v4(24.233,7.127)
  Bot Sig/Pwr w0.075: U11.8@9,3.938 9,3.489 9.044,3.445 9.044,3.035 9.358,2.721 v2(9.358,2.712) ; v2(10.193,2.332) 10.193,1.283 v2(10.413,1.064)
I2C_B_SDA: J2.32 J5.5 R29.2 U5.K2 U11.4 | length 23.2
  Top Sig/Pwr w0.075: J5.5@4.818,12.286 5.553,12.286 5.867,11.972 5.867,11.413 v1(6.157,11.122) ; v1(10.618,3.981) 10.618,3.987 10.9,4.269 U5.K2@10.9,4.275
  GND1 w0.075: v1(6.157,11.122) 6.175,11.122 6.254,11.044 v3(6.272,11.044) ; v1(10.618,3.981) 10.618,3.995 v3(10.682,4.059)
  Sig2 w0.075: v4(8.391,11.291) 8.434,11.291 v4@8.475,11.333 ; v4@8.476,11.332 9.218,11.332 9.612,10.938 9.612,7.463 9.837,7.238 9.837,6.716 9.991,6.563 10.287,6.563 10.562,6.837 12.785,6.837 12.976,6.646 12.976,6.436 12.768,6.228 12.768,6.199 12.657,6.088 12.657,5.905 12.603,5.852 12.603,5.573 12.264,5.234 11.948,5.234 v4(11.533,5.649) 11.246,5.65 10.831,5.234 10.831,4.757 10.644,4.57 v4(10.593,4.57)
  GND3 w0.075: v2(6.164,10.72) 6.164,10.732 6.265,10.833 v5(6.265,10.846) ; v2(10.226,4.544) 10.233,4.551 10.42,4.551 v5(10.427,4.558) ; v5(11.146,5.516) 11.146,5.522 v2(11.152,5.528)
  Sig1 w0.075: v3(6.272,11.044) 6.361,10.955 v4(6.361,10.936) ; v4@6.356,10.941 7.272,11.857 8.261,11.857 8.391,11.727 8.391,11.323 v4@8.362,11.295 ; v4(10.593,4.57) 10.593,4.509 10.533,4.448 10.533,4.225 10.682,4.075 v3(10.682,4.059)
  Pwr w0.075: v5(6.265,10.846) 6.355,10.936 v4(6.361,10.936) ; v5(11.146,5.516) 11.166,5.536 11.358,5.536 11.472,5.649 v4(11.533,5.649)
  Bot Sig/Pwr w0.075: J2.32@5.345,8.85 5.565,8.85 5.932,9.217 5.932,9.426 5.938,9.431 5.938,10.032 5.957,10.051 5.957,10.331 6.067,10.441 6.067,10.589 6.164,10.686 v2(6.164,10.72) ; v2(11.152,5.528) 11.155,5.525 R29.2@11.171,5.525
I2C_B_SDA_GAP: GAP1.K4 U11.5 | length 31
  Top Sig/Pwr w0.075: GAP1.K4@19.275,7.45 19.285,7.46 19.705,7.46 19.939,7.226 v1(20.7,7.226)
  GND1 w0.075: v1(20.7,7.226) 20.7,7.124 v3(20.704,7.119)
  Sig2 w0.075: v4(20.483,7.231) 20.483,7.265 20.722,7.505 21.294,7.505 21.658,7.14 21.902,7.14 22.811,8.05 23.223,8.05 23.695,7.578 23.695,7.274 v4(24.233,6.736)
  GND3 w0.075: v2(13.33,0.45) 13.803,0.45 13.866,0.387 17.907,0.387 18.032,0.512 18.334,0.512 v5(18.348,0.499)
  Sig1 w0.075: v4(20.483,7.231) 20.526,7.188 20.602,7.188 20.671,7.119 v3(20.704,7.119)
  Pwr w0.075: v5(18.348,0.499) 18.372,0.475 18.5,0.475 18.587,0.387 19.875,0.387 20.187,0.7 20.187,1.187 20.529,1.528 20.534,1.528 20.668,1.663 24.311,1.663 24.613,1.964 24.613,3.193 24.461,3.344 24.461,5.071 24.208,5.324 24.204,5.324 24.12,5.408 24.12,6.569 24.217,6.666 v4@24.217,6.698
  Bot Sig/Pwr w0.075: U11.5@10.2,3.938 10.2,4.131 10.262,4.193 10.362,4.193 10.398,4.229 10.574,4.229 10.751,4.052 10.751,3.75 11.103,3.398 11.103,2.87 11.376,2.598 11.402,2.598 11.479,2.521 11.479,0.758 12.05,0.187 13.067,0.187 v2(13.33,0.45)
I2C_GAP_SEL: U5.H10 U11.6 U11.7 U11.14 U11.15 | length 5.2
  Top Sig/Pwr w0.075: v1(10.195,7.071) 10.196,7.071 U5.H10@10.2,7.075
  GND1 w0.075: v1(10.195,7.071) 10.208,7.058 10.208,6.961 v3(10.221,6.948)
  GND3 w0.075: v2(9.8,6.538) 10.062,6.538 10.181,6.657 v5(10.196,6.657)
  Sig1 w0.075: v4(10.099,6.825) v3(10.221,6.948)
  Pwr w0.075: v4(10.099,6.825) 10.099,6.788 10.196,6.691 v5(10.196,6.657)
  Bot Sig/Pwr w0.075: U11.7@9.4,3.942 9.4,4.593 9.782,4.975 ; U11.14@9.4,6.342 9.738,6.342 9.8,6.281 U11.15@9.8,6.184 ; U11.15@9.8,6.342 9.855,6.287 9.855,5.943 9.886,5.912 9.886,5.079 9.782,4.975 ; U11.6@9.813,3.929 9.782,3.961 9.782,4.975
IMU_INT1: U5.H3 U14.7 | length 33
  Top Sig/Pwr w0.075: v1(9.135,12.897) 9.286,12.897 v1(9.962,13.573) ; v1(10.106,5.761) 10.106,5.727 10.35,5.483 10.35,5.418 10.332,5.4 10.332,4.885 10.35,4.867 10.35,4.775 U5.H3@10.2,4.625 ; U14.7@21.638,13.024 21.638,13.032 21.727,13.121 v1(21.828,13.121)
  GND1 w0.075: v3(6.581,6.141) 6.734,5.988 6.734,5.555 6.953,5.336 7.742,5.336 7.775,5.369 7.863,5.369 7.917,5.315 8.203,5.315 8.367,5.48 8.427,5.48 8.433,5.486 8.534,5.486 8.538,5.49 8.657,5.49 8.937,5.769 8.937,5.869 v3(9.24,6.173) ; v3(9.092,12.646) 9.113,12.667 9.113,12.875 v1(9.135,12.897) ; v1(9.962,13.573) 9.996,13.573 10.02,13.549 10.104,13.549 10.15,13.595 v3(10.184,13.595) ; v3(10.05,5.85) 10.05,5.817 v1(10.106,5.761) ; v3(21.639,13.058) 21.663,13.082 21.755,13.082 21.794,13.121 v1(21.828,13.121)
  Sig2 w0.075: v4(5.619,10.669) 5.619,10.665 5.373,10.419 5.373,7.087 5.75,6.711 6.022,6.711 6.376,6.356 v4(6.376,6.315)
  Sig1 w0.075: v4(5.619,10.669) 5.566,10.669 5.407,10.829 5.231,10.829 5.123,10.936 5.123,11.2 5.286,11.362 5.459,11.362 6.128,12.032 6.423,12.032 6.481,12.089 6.587,12.089 7.21,12.712 8.08,12.712 8.164,12.628 9.074,12.628 v3(9.092,12.646) ; v4(6.376,6.315) 6.391,6.315 6.566,6.141 v3(6.581,6.141) ; v3(9.24,6.173) 9.252,6.184 9.382,6.184 9.508,6.31 9.971,6.31 10.096,6.186 10.096,6.105 10.054,6.063 10.054,5.854 v3(10.05,5.85) ; v3(10.184,13.595) 10.218,13.595 10.379,13.756 v4(10.415,13.756) ; v4(20.338,12.692) 20.338,12.704 20.669,13.035 21.615,13.035 v3(21.639,13.058)
  Pwr w0.075: v4(10.415,13.756) 10.692,13.479 12.97,13.479 14.249,12.201 15.092,12.201 15.705,12.813 16.323,12.813 16.359,12.849 16.457,12.849 16.481,12.873 16.508,12.873 16.552,12.917 16.552,13.315 17.024,13.788 18.202,13.788 18.978,13.011 19.523,13.011 19.683,12.851 20.126,12.851 20.285,12.692 v4(20.338,12.692)
IND_IN: GAP1.B7 L7.1 | length 4.5
  Top Sig/Pwr w0.15: v1(16.41,8.534) 16.431,8.534 16.466,8.5 GAP1.B7@16.475,8.5
  Top Sig/Pwr w0.4: L7.1@14.2,6.6 14.475,6.6 14.675,6.8 v1(14.675,7.15)
  GND1 w0.15: v1@16.376,8.568 16.362,8.568 16.315,8.521 v3(16.301,8.521) 16.307,8.528 16.404,8.528 v1(16.41,8.534)
  GND1 w0.4: v1(14.675,7.15) 14.759,7.15 14.846,7.237 v3(14.861,7.237)
  Sig1 w0.2: v3(14.861,7.237) 14.861,7.359 v4(14.873,7.371)
  Sig1 w0.25: v4(15.978,8.888) 15.978,8.874 16.301,8.551 v3(16.301,8.521)
  Pwr w0.3: 15.85,8.789 15.948,8.888 v4(15.978,8.888)
  Pwr w0.4: v4(14.873,7.371) 14.823,7.371 14.65,7.544 14.65,8.075 15.024,8.449 15.27,8.449 15.61,8.789 15.85,8.789
JTAG_T\R\S\T\: GAP1.F2 J4.3 | length 15.2
  GND1 w0.075: v1(17.87,6.733) 17.87,6.7 17.74,6.57 17.74,6.567 17.658,6.485 17.658,6.272 17.572,6.186 17.572,5.924 17.921,5.575 v3(17.95,5.575)
  Sig2 w0.075: v4(22.935,9.892) 22.935,10.159 23.447,10.671
  GND3 w0.075: v5(23.205,9.653) 23.229,9.677 23.346,9.677 23.415,9.745 v2(23.449,9.745)
  Sig1 w0.075: v3(17.95,5.575) 17.967,5.575 18.429,5.114 v4(18.446,5.114)
  Pwr w0.075: v4(18.446,5.114) 18.479,5.147 18.634,5.147 18.677,5.19 18.894,5.19 19.017,5.067 19.158,5.067 19.246,4.979 19.571,4.979 19.739,4.811 20.311,4.811 20.473,4.649 20.821,4.649 21.047,4.423 21.047,4.333 21.287,4.093 21.913,4.093 22.026,3.98 22.896,3.98 23.157,4.241 23.168,4.241 23.271,4.344 23.329,4.344 23.486,4.501 23.486,5.15 23.487,7.162 23.365,7.283 23.365,7.734 22.943,8.156 22.943,8.218 23.253,8.529 23.253,9.05 23.205,9.098 v5(23.205,9.653) 23.189,9.653 22.95,9.892 v4(22.935,9.892)
JTAG_TCK: GAP1.G4 J4.5 | length 14.5
  GND1 w0.075: v1(18.216,7.457) 18.24,7.481 18.24,7.557 18.275,7.591 v3(18.275,7.625)
  GND3 w0.075: v5(21.752,4.519) 21.752,4.531 21.896,4.675 v2(21.896,4.99) ; v2(23.669,9.362) 23.7,9.362 23.776,9.438 v5(24.023,9.438) ; v5(24.894,10.025) 24.908,10.025 25.082,10.199 25.097,10.199
  Sig1 w0.075: v3(18.275,7.625) 18.299,7.601 18.711,7.601 18.749,7.563 18.755,7.563 19.173,7.145 19.173,6.817 19.226,6.764 19.226,6.691 19.992,5.925 19.992,5.873 20.201,5.665 21.472,5.665 21.863,5.275 21.863,4.729 21.88,4.712 21.88,4.569 v4(21.923,4.526)
  Pwr w0.075: v5(21.752,4.519) 21.755,4.522 21.92,4.522 v4(21.923,4.526) ; v5(24.023,9.438) 24.043,9.417 24.235,9.417 24.253,9.4 24.411,9.4 24.763,9.752 24.763,9.86 24.894,9.991 v5(24.894,10.025)
  Bot Sig/Pwr w0.075: v2(21.896,4.99) 21.873,5.014 21.873,5.193 21.638,5.428 21.638,6.469 21.696,6.527 21.696,6.921 21.68,6.936 21.68,7.242 22.188,7.75 22.769,7.75 22.813,7.794 22.813,9.3 22.856,9.344 J4.5@23.442,9.344 ; J4.5@23.455,9.35 23.467,9.362 v2(23.669,9.362)
JTAG_TDI: GAP1.E2 J4.9 | length 16.7
  GND1 w0.075: v1(17.567,6.7) 17.543,6.676 17.543,6.583 17.422,6.462 17.422,5.862 17.566,5.718 17.566,5.605 v3(17.59,5.581)
  GND3 w0.075: v5(23.417,8.392) 23.417,8.401 23.561,8.545 v2(23.561,8.554)
  Sig1 w0.075: v3(17.59,5.581) 18.023,5.147 18.023,5.086 18.121,4.988 v4(18.121,4.928)
  Pwr w0.075: v4(18.121,4.928) 18.392,4.656 18.894,4.656 19.067,4.829 19.509,4.829 19.677,4.661 20.215,4.661 20.432,4.444 20.432,4.296 20.922,3.806 21.246,3.806 21.383,3.943 21.849,3.943 21.962,3.83 22.958,3.83 23.219,4.091 23.288,4.091 23.636,4.439 23.636,5.088 ; 23.637,5.088 23.637,7.224 23.515,7.345 23.515,7.796 23.417,7.894 v5(23.417,8.392) 23.417,9.739 23.38,9.777 23.38,9.779 23.358,9.8 23.358,9.869 23.272,9.956 23.272,10.132 23.431,10.291 23.49,10.291 23.65,10.451 24.095,10.451 24.219,10.575 24.496,10.575 24.621,10.451 24.905,10.451 24.968,10.388
JTAG_TDO: GAP1.F3 J4.11 | length 22.8
  GND1 w0.075: v1(17.909,7.1) 17.933,7.124 17.933,7.205 17.977,7.249 v3(17.977,7.283)
  GND3 w0.075: v2(23.569,8.147) 23.602,8.147 23.653,8.198 23.826,8.198 v5(23.85,8.222) ; v5(24.563,10.048) 24.563,10.056 24.975,10.468 24.975,10.475
  Sig1 w0.075: v4(14.861,6.511) 14.922,6.511 14.992,6.441 14.999,6.441 15.107,6.334 15.574,6.334 15.649,6.41 16.18,6.41 17.264,7.493 17.442,7.493 17.526,7.409 17.703,7.409 17.806,7.306 17.953,7.306 v3(17.977,7.283)
  Pwr w0.075: v4(14.861,6.511) 14.818,6.468 14.818,6.294 14.81,6.286 14.81,6.204 15.395,5.619 15.811,5.619 17.224,4.206 19.081,4.206 19.254,4.379 19.322,4.379 19.508,4.193 19.803,4.193 19.996,4 20.063,4 20.113,3.95 20.348,3.95 20.792,3.506 21.37,3.506 21.507,3.643 21.724,3.643 21.837,3.53 23.083,3.53 23.344,3.791 23.412,3.791 24.311,4.69 24.311,5.009 24.157,5.162 24.154,5.162 23.97,5.346 23.97,7.315 23.815,7.47 23.815,7.918 ; 23.815,7.919 23.815,8.076 23.826,8.087 23.826,8.198 v5(23.85,8.222) 23.85,8.584 23.717,8.716 23.717,9.432 23.937,9.653 24.142,9.653 24.166,9.628 24.383,9.628 24.561,9.805 24.561,10.045 v5(24.563,10.048)
JTAG_TMS/CS_RAM_GATE: GAP1.D1 J4.7 R12.2 U16.2 | length 30.7
  Top Sig/Pwr w0.075: GAP1.D1@17.175,6.4 17.191,6.384 17.191,6.074 v1(17.206,6.059)
  GND1 w0.075: v1(17.206,6.059) 17.216,6.048 17.216,5.856 17.378,5.694 17.378,5.393 17.275,5.29 17.275,5.197 v3(17.251,5.173)
  Sig2 w0.075: v4(24.038,3.9) 24.038,3.909 24.218,4.09 24.218,4.143 24.837,4.763
  GND3 w0.075: v2(17.685,11.789) 17.708,11.813 17.9,11.813 v5(17.924,11.836) ; v5(18.025,12.7) 18.001,12.724 18.001,12.865 17.978,12.888 17.978,12.95 18.066,13.038 v2(18.066,13.261) ; v2(22.51,9.84) 22.544,9.84 22.671,9.713 22.737,9.713 22.777,9.673 22.827,9.673 22.951,9.549 22.951,9.523 23.013,9.462 23.013,9.104 v2(23.025,9.091) ; v5(24.139,4.078) 24.139,4.09 24.26,4.211 v2(24.26,4.222)
  Sig1 w0.075: v3@17.249,5.173 17.249,5.168 17.148,5.067 17.148,4.68 17.342,4.486 17.349,4.486 17.471,4.365 19.018,4.365 19.264,4.61 20.137,4.61 20.177,4.649 20.821,4.649 20.975,4.495 20.975,4.278 20.901,4.204 20.901,4.082 21.533,3.449 21.586,3.449 21.784,3.251 v4(21.804,3.251)
  Pwr w0.075: v5(17.924,11.836) 17.958,11.836 18.077,11.716 18.383,11.716 18.458,11.792 18.458,12.354 18.175,12.638 18.121,12.638 18.059,12.7 v5(18.025,12.7) ; v4(21.804,3.251) 21.821,3.268 22.466,3.268 22.568,3.371 22.786,3.371 22.79,3.366 23.131,3.366 23.276,3.511 23.987,3.511 24.139,3.663 24.139,3.9 24.09,3.95 24.09,3.995 v5@24.139,4.045 ; v4(24.038,3.9) 24.038,3.943 v5@24.139,4.045 ; v5@24.139,4.048 v5@24.139,4.045 ; v5(24.139,4.078) v5@24.139,4.045
  Bot Sig/Pwr w0.075: v2(18.066,13.261) 18.112,13.261 18.739,13.888 19.572,13.888 19.763,14.078 19.763,14.097 19.878,14.213 20.322,14.213 20.531,14.003 20.531,13.75 20.74,13.541 21.787,13.541 22.106,13.223 22.106,12.888 22.172,12.822 22.172,12.253 22.504,11.92 22.504,10.95 22.572,10.882 22.572,10.409 22.51,10.347 v2(22.51,9.84) ; v2(23.025,9.091) 23.039,9.077 23.113,9.077 23.24,8.95 J4.7@23.455,8.95 ; J4.7@23.526,8.935 23.575,8.886 24.067,8.886 24.144,8.809 24.243,8.809 24.325,8.728 R12.2@24.325,8.475 24.611,8.189 24.611,8.098 24.613,8.097 24.613,7.653 24.611,7.652 24.611,4.571 24.263,4.222 v2(24.26,4.222)
LED_EN: U5.K4 U15.A1 | length 13.9
  Top Sig/Pwr w0.075: v1(10.895,4.971) U5.K4@10.9,4.975 ; v1(21.142,2.733) 21.836,2.733 21.961,2.608 U15.A1@21.981,2.608
  GND1 w0.075: v1(10.895,4.971) 10.895,4.953 11.11,4.738 12.728,4.738 13.339,4.127 13.717,4.127 13.958,3.885 13.958,3.743 14.093,3.608 14.148,3.608 v3(14.307,3.449) ; v3(20.888,3.034) 20.888,3.011 21.142,2.757 v1(21.142,2.733)
  Sig2 w0.075: v4(14.131,3.499) 14.142,3.488 16.265,3.488 17.039,4.261 17.526,4.261 17.572,4.215 18.082,4.215 18.524,3.773 19.476,3.773 19.633,3.931 v4(19.694,3.931)
  Sig1 w0.075: v4(14.131,3.499) 14.157,3.473 14.283,3.473 v3(14.307,3.449) ; v4(19.694,3.931) 19.694,3.989 19.875,4.17 20.143,4.17 20.967,3.346 20.967,3.114 20.944,3.091 20.944,3.085 20.893,3.034 v3(20.888,3.034)